# EAGLE board adapter (EAGLE 9.1.1)
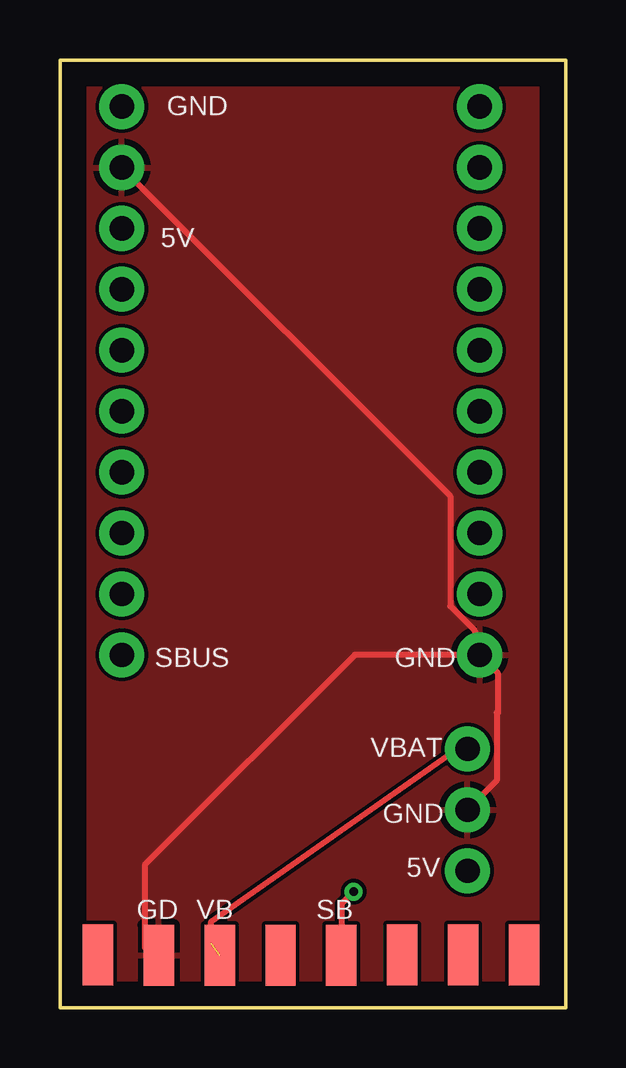
[diagram p0: board, top side]
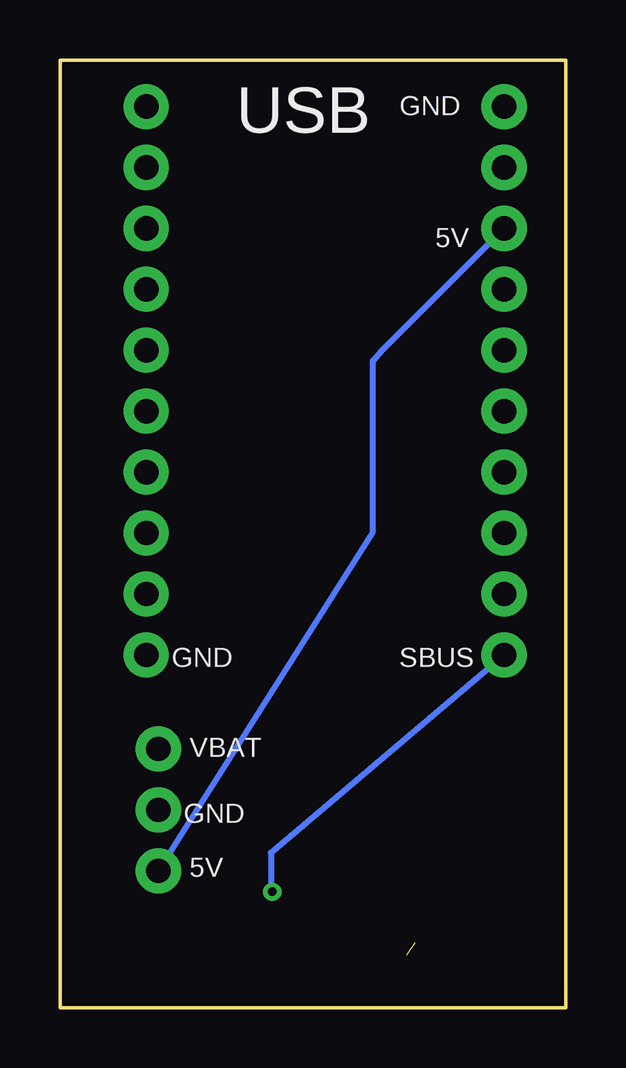
[diagram p1: board, bottom side, seen from below]

Size 21.1 x 39.51 mm. Coordinates in mm from the lower left corner, seen from the top.
Outline: 0,39.51 21.1,39.51 21.1,0 0,0 0,39.51
Copper layers (1*16): Top 0.035mm / dielectric 1.5mm / Bottom 0.035mm
Design rules "default": minimum track width 6mil, minimum drill 0.35mm, track to track 6mil, track to pad 6mil, pad to pad 6mil, via to via 6mil, smd to smd 6mil, copper to edge 40mil, drill to drill 6mil, minimum pad ring 10mil, minimum via ring 8mil, stop-mask expansion 4mil, vias tented up to drill 0mil, thermal gap 10mil

## Footprints (pad centres in the part's own frame; a part is rotated, then mirrored left to right if it is on the bottom)
SMD1,27-2,54 = smd 1.27 x 2.54: 1 0,0
1X10_NO_SILK = drill 1.016 pad 1.88: 1 0,0; 2 2.54,0; 3 5.08,0; 4 7.62,0; 5 10.16,0; 6 12.7,0; 7 15.24,0; 8 17.78,0; 9 20.32,0; 10 22.86,0
1X03_NO_SILK = drill 1.016 pad 1.88: 1 0,0; 2 2.54,0; 3 5.08,0

## Placement (x,y rotation side)
GND  [SMD1,27-2,54]  4.12,2.19 0 top
J1  [1X10_NO_SILK]  17.5,14.71 90 bottom
J2  [1X10_NO_SILK]  2.58,14.71 90 bottom
J3  [1X03_NO_SILK]  17,5.71 90 top
PAD1  [SMD1,27-2,54]  9.2,2.19 0 top
PAD2  [SMD1,27-2,54]  14.28,2.21 0 top
PAD3  [SMD1,27-2,54]  16.82,2.21 0 top
PAD4  [SMD1,27-2,54]  1.58,2.21 0 top
PAD5  [SMD1,27-2,54]  19.36,2.21 0 top
SBUS  [SMD1,27-2,54]  11.74,2.19 0 top
VBAT  [SMD1,27-2,54]  6.66,2.19 0 top

## Library data of the parts
GND PAD1-PAD5 SBUS VBAT = wirepad
J1-J3 = SparkFun-Connectors

## Nets
3V3: J1.4
5V: J2.8 J3.1
GND: GND.1 J1.1 J2.9 J3.2
M2: J1.9
M3: J1.8
SBUS: J2.1 SBUS.1
VBAT: J3.3 VBAT.1

## Tracks (layer width: path | path; a pad name or v marks a point on that pad's centre or on a via)
5V
  Bottom 0.254: J3.1 8.05,19.82 8.05,26.96 7.7,27.37 J2.8
GND
  Top 0.152: 3.54,2.52 GND.1
  Top 0.254: 3.54,2.52 3.54,5.95 12.3,14.71 17.3,14.71 | 17.3,14.71 J1.1 18.25,13.96 18.25,12.26 18.21,12.3 18.21,9.47 J3.2 | J2.9 16.28,21.33 16.28,16.75 17.3,15.73 17.3,14.71
  pour Top: -0.85,41.41 21.95,41.41 21.95,-1 -0.85,-1
SBUS  (via drill 0.35)
  Top 0.254: v12.25,4.84 11.74,4.33 SBUS.1
  Bottom 0.254: J2.1 12.3,6.46 12.3,4.89 v12.25,4.84
VBAT  (1 unrouted)
  Top 0.254: 6.29,2.71 6.29,3.56 16.6,10.79 J3.3

## Text on the board
tNames: GND | 5V | SBUS | GND | VBAT | GND | 5V | GD | VB | SB
bNames: GND | USB | 5V | SBUS | GND | VBAT | GND | 5V